# Altium PCB MainPCB.PcbDoc
Units mil, origin at the board's own origin, x right, y up, seen from the top; angles counter-clockwise.
Board outline 797.24 x 570.87 mil, 2 copper layers (Top Layer, Bottom Layer); 4 components, 5 nets, 21 pads, 0 vias.
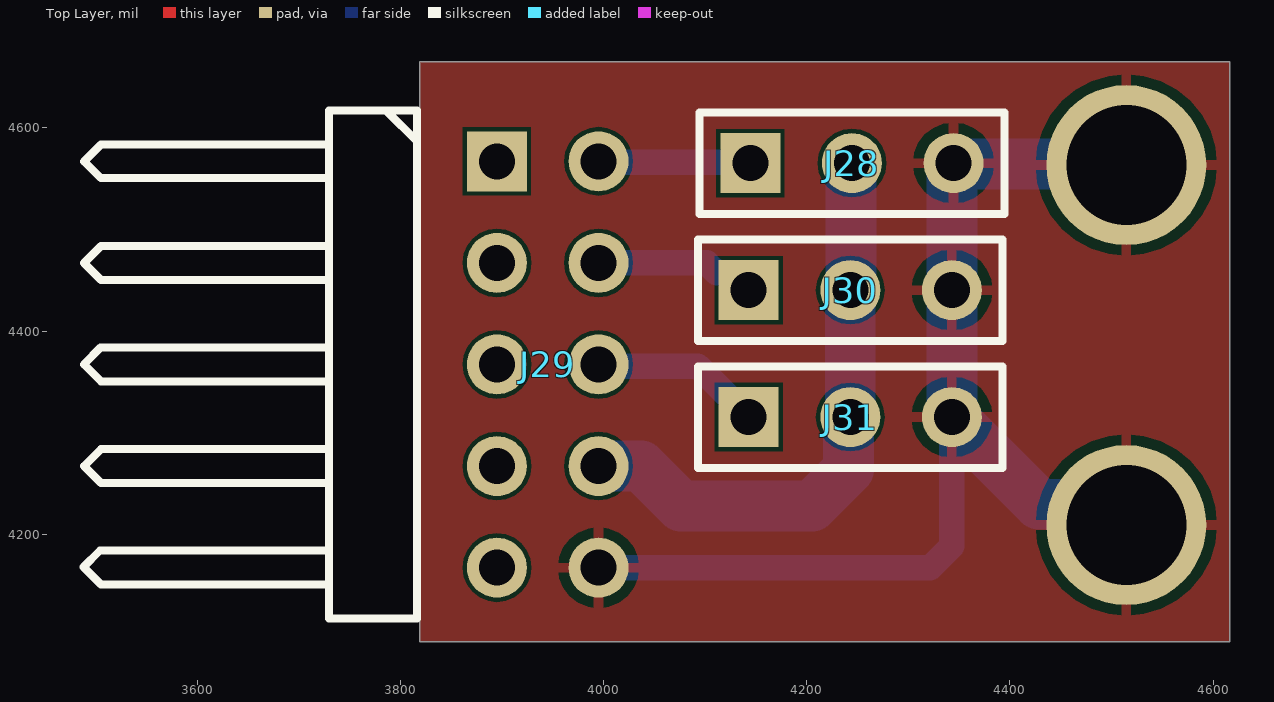
[diagram p0: Top Layer view]
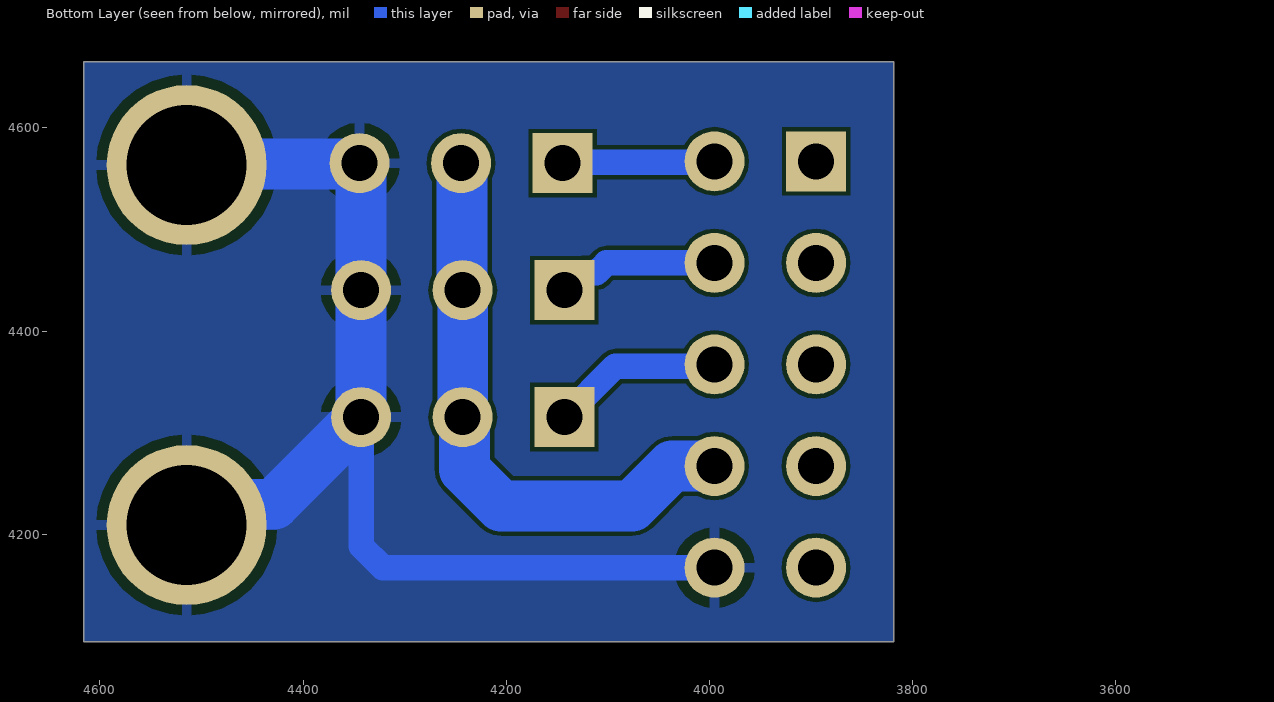
[diagram p1: Bottom Layer view, seen from below]

## Layer stack, top to bottom
Top Solder: solder mask 0.4, Solder Resist, Dk 3.5
Top Layer: signal copper 1.4
Dielectric 1: dielectric 12.6, FR-4, Dk 4.8
Bottom Layer: signal copper 1.4
Bottom Solder: solder mask 0.4, Solder Resist, Dk 3.5

## Board outline
3818.9,4094.49 3818.9,4665.35 4616.14,4665.35 4616.14,4094.49

## Design rules (kind name [scope] priority, off if disabled: settings)
Clearance [All] p1: gap=4 ignorepadtopadclearanceinfootprint=FALSE
HoleSize [All] p1: absolutevalues=TRUE maxlimit=393.7 minlimit=1 maxpercent=80.000 minpercent=20.000
MinimumSolderMaskSliver [All] p1: minsoldermaskwidth=3.94
PlaneClearance [All] p1: clearance=40
PolygonConnect [All] p1: connectstyle=Relief reliefconductorwidth=10 reliefentries=4 polygonreliefangle="90 Angle" airgapwidth=10
RoutingVias [All] p1: holewidth=15 width=30 viastyle="Through Hole" minholewidth=15 minwidth=30 maxholewidth=25 maxwidth=50
SilkToSolderMaskClearance [IsPad] p1: minsilkscreentomaskgap=3.94 clearancetoexposedcopper=TRUE
SolderMaskExpansion [All] p1: expansion=4
Width [All] p1: maxlimit=50 minlimit=10 preferedwidth=10
26 further rules are at their usual default settings.

## Components (designator, comment, footprint, x,y, rotation, side; value= is the part's Value field where it differs from the comment)
J28 "BARRETTE 3 CONTACTS 1 RANGEE MALE DROITE" BARRETTE_3_M_D 4144.49,4565.35 r0 top
J29 "BARRETTE_5 CONTACTS_2 RANGEES_MALE_COUDEE" BARRETTE_5X2_M_C 3895.08,4567.16 r270 top
J30 "BARRETTE 3 CONTACTS 1 RANGEE MALE DROITE" BARRETTE_3_M_D 4142.91,4440.38 r0 top
J31 "BARRETTE 3 CONTACTS 1 RANGEE MALE DROITE" BARRETTE_3_M_D 4142.91,4315.41 r0 top

## Footprints (in the part's own frame and the unit in brackets; to place one, negate y for a bottom-side part, rotate by r counter-clockwise, add the part's x,y. Pads: shape width x height; smd on the part's side, far side on the other; paste and mask are expansions set on the pad)
BARRETTE_3_M_D [mm] "BARRETTE 3 CONTACTS ; 1 RANGEE ; DROITE ; MALE ; ESPACEMENT BROCHES = 2.54 mm"
  rect 1.5x1.5 hole 0.9: 1(0,0)
  round 1.5 hole 0.9: 2(2.54,0) 3(5.08,0)
  silkscreen extent -1.27,-1.27 6.35,1.27, body extent -1.21,-1.42 6.41,1.5, height 8.61
BARRETTE_5X2_M_C [mm] "BARRETTE 5 CONTACTS ; 2 RANGEES ; COUDEE ; MALE ; ESPACEMENT BROCHES = 2.54 mm"
  rect 1.5x1.5 hole 0.9: 1(0,0)
  round 1.5 hole 0.9: 2(0,2.54) 3(2.54,0) 4(2.54,2.54) 5(5.08,0) 6(5.08,2.54) 7(7.62,0) 8(7.62,2.54) 9(10.16,0) 10(10.16,2.54)
  silkscreen extent -1.27,-10.34 11.43,-2, body extent -1.3,-9.9 11.4,2.86, height 5.64

## Part data
J28 J30 J31: library part "BARRETTE_3 CONTACTS_1 RANGEE_MALE_DROITE", Type=M_D_3
J29: "BARRETTE 5 CONTACTS 2 RANGEES MALE COUDEE", Type=M_C_5X2

## Free pads (board coordinates)
  round 157.48 hole 118.11: 2(4514.57,4209.11) 2(4514.57,4563.44)

## Nets (pads, with @x,y where several pads share a name; then routed paths per layer and width w, separated by ;. In a path a pad name is that pad's centre, name@x,y a point inside that pad or via, vN(x,y) a via of type N, cw(c..) or ccw(c..) an arc to the next point about the centre after c; other vN are vias at no path point)
+5: J28.2 J29.8 J30.2 J31.2 | length 580.2
  Bottom Layer w50: J29.8 4036.9,4267.16 4076.27,4227.78 4205.12,4227.78 4241.18,4263.85 4241.18,4313.68 J31.2 J30.2 4243.7,4441.17 4243.7,4564.57 J28.2
GND: J28.3 J29.10 J30.3 J31.3 pad.2 | length 1120.8
  Bottom Layer w25: J29.10 4321.65,4167.16 4342.91,4188.41 J31.3
  Bottom Layer w50: pad.2@4514.57,4209.11 4494,4229.68 4428.65,4229.68 J31.3 J30.3 4342.91,4563.78 J28.3 4345.44,4564.4 4513.61,4564.4 pad.2@4514.57,4563.44
NetJ28_1: J28.1 J29.2 | length 150.2
  Bottom Layer w25: J29.2 3995.98,4566.25 4143.59,4566.25 J28.1
NetJ29_4: J29.4 J30.1 | length 158.9
  Bottom Layer w25: J29.4 4101.48,4467.16 4111.22,4457.41 4125.89,4457.41 J30.1
NetJ29_6: J29.6 J31.1 | length 169.3
  Bottom Layer w25: J29.6 3996.65,4365.58 4092.75,4365.58 J31.1
pads on no net: J29.1 J29.3 J29.5 J29.7 J29.9

## Polygon pours and split planes (outlines as drawn)
GND on Top Layer "Top Layer-GND" (solid, pour order 0): 3818.9,4665.35 3818.9,4094.49 4616.14,4094.49 4616.14,4665.35
GND on Bottom Layer "Bottom Layer-GND" (solid, pour order 2): 3818.9,4665.35 3818.9,4094.49 4616.14,4094.49 4616.14,4665.35

## Silkscreen, mask and mechanical layers (free items; w line width, h text height)
Mechanical 1:
  the board outline again, w10